# EAGLE board Copy of Copy of UPDATED 06.12.2024 microcontroller badge (EAGLE 9.7.0)

Size 230.49 x 124.48 mm. Coordinates in mm from the lower left corner, seen from the top.
Outline: 0,0 230.49,0 230.49,124.48 0,124.48 0,0
Copper layers (1*16): Top 0.035mm / dielectric 1.5mm / Bottom 0.035mm
Design rules "default": minimum track width 6mil, minimum drill 0.35mm, track to track 6mil, track to pad 6mil, pad to pad 6mil, via to via 6mil, smd to smd 6mil, copper to edge 40mil, drill to drill 6mil, minimum pad ring 10mil, minimum via ring 8mil, stop-mask expansion 4mil, vias tented up to drill 0mil, thermal gap 10mil

## Footprints (pad centres in the part's own frame; a part is rotated, then mirrored left to right if it is on the bottom)
BATTERY-GENERIC = drill 1.118 pad 3.15 octagon: + 2.54,0; - -2.54,0
LEDRD254W60D565H860B = drill 0.981 pad 1.581: 1 -1.27,0; 2 1.27,0
LEDRD254W60D565H860B_O = drill 0.981 pad 1.581: 1 -1.27,0; 2 1.27,0
LEDRD254W60D565H860B_Y = drill 0.981 pad 1.581: 1 -1.27,0; 2 1.27,0
LEDRD254W60D565H860B_G = drill 0.981 pad 1.581: 1 -1.27,0; 2 1.27,0
LEDRD254W60D565H860B_B = drill 0.981 pad 1.581: 1 -1.27,0; 2 1.27,0
PIEZO = drill 1 pad 1.6: 1 -3.5,0; 2 3.5,0
RESAD1016W63L850D250B = drill 0.83 pad 1.43: 1 -5.08,0; 2 5.08,0
HA-06-SM065 = drill 1 pad 1.676: 1 -2.54,-2.54; 2 0,2.54; 3 2.54,-2.54
SWITCH-MOMENTARY-PTH-6.5MM = drill 1.016 pad 1.88: 1 -3.251,2.261; 2 3.251,2.261; 3 -3.251,-2.261; 4 3.251,-2.261
SWITCH-SPDT-PTH-8.5X3.7MM = drill 1.016 pad 1.88: 1 -2.54,0; 2 0,0; 3 2.54,0
ARDUINO-UNO-R3-SHIELD = drill 1.016 pad 1.88: 3.3V 24.13,-2.54; 5V 24.13,0; A0 24.13,12.7; A1 24.13,15.24; A2 24.13,17.78; A3 24.13,20.32; A4 24.13,22.86; A5 24.13,25.4; AREF -24.13,-13.97; D2 -24.13,20.32; D3 -24.13,17.78; D4 -24.13,15.24; D5 -24.13,12.7; D6 -24.13,10.16; D7 -24.13,7.62; D8 -24.13,3.81; D9 -24.13,1.27; D10 -24.13,-1.27; D11 -24.13,-3.81; D12 -24.13,-6.35; D13 -24.13,-8.89; GND@0 24.13,2.54; GND@1 24.13,5.08; GND@2 -24.13,-11.43; IOREF 24.13,-7.62; NC 24.13,-10.16; RES 24.13,-5.08; RX -24.13,25.4; SCL -24.13,-19.05; SDA -24.13,-16.51; TX -24.13,22.86; VIN 24.13,7.62
DIP787W55P254L958H533Q8B-8P3 = drill 0.852 pad 1.452: 1 -3.81,3.81; 2 -3.81,1.27; 3 -3.81,-1.27; 4 -3.81,-3.81; 5 3.81,-3.81; 6 3.81,-1.27; 7 3.81,1.27; 8 3.81,3.81
JHD-162A = drill 1.016 long: 1 -19.05,0; 2 -16.51,0; 3 -13.97,0; 4 -11.43,0; 5 -8.89,0; 6 -6.35,0; 7 -3.81,0; 8 -1.27,0; 9 1.27,0; 10 3.81,0; 11 6.35,0; 12 8.89,0; 13 11.43,0; 14 13.97,0; 15 16.51,0; 16 19.05,0

## Placement (x,y rotation side)
BAT1  4.5V  [BATTERY-GENERIC]  56.52,114.14 270 top
D1  RED  [LEDRD254W60D565H860B]  31.21,48.58 0 top
D2  ORANGE  [LEDRD254W60D565H860B_O]  25.51,48.43 0 top
D3  YELLOW  [LEDRD254W60D565H860B_Y]  18.91,48.64 0 top
D4  GREEN  [LEDRD254W60D565H860B_G]  12.79,48.64 0 top
D5  BLUE  [LEDRD254W60D565H860B_B]  6.06,48.39 0 top
PIEZOSOUNDTACK  PIEZO  [PIEZO]  66.65,87.73 0 top
R1  220  [RESAD1016W63L850D250B]  48.84,83.11 90 top
R2  220  [RESAD1016W63L850D250B]  182.52,115.51 270 top
R3  220  [RESAD1016W63L850D250B]  46.34,83.06 90 top
R4  220  [RESAD1016W63L850D250B]  43.94,82.88 90 top
R5  220  [RESAD1016W63L850D250B]  51.58,82.88 90 top
R6  220  [RESAD1016W63L850D250B]  41.4,82.88 90 top
RPOTCONTRAST1  10k  [HA-06-SM065]  93.69,90.95 0 top
SDEBUG  SWITCH_MOMENTARY  [SWITCH-MOMENTARY-PTH-6.5MM]  125.67,59.07 270 top
SGAMEPLAY  SWITCH_MOMENTARY  [SWITCH-MOMENTARY-PTH-6.5MM]  133.68,59.35 270 top
SMUTE/UNMUTE  TOGGLE  [SWITCH-SPDT-PTH-8.5X3.7MM]  135.22,69.68 0 top
UARDUINO  ARDUINO-UNO-R3-SHIELD  [ARDUINO-UNO-R3-SHIELD]  182.6,82.75 90 top
UATTINY  ATtiny25-20PU  [DIP787W55P254L958H533Q8B-8P3]  45.04,50.47 90 top
ULDC_DISPLAY  LCD-16X2JHD-162A  [JHD-162A]  95.84,36.63 0 top

## Library data of the parts
BAT1 PIEZOSOUNDTACK R1-R6 RPOTCONTRAST1 SDEBUG SGAMEPLAY SMUTE/UNMUTE UARDUINO ULDC_DISPLAY = Tinkercad
D1 = Tinkercad; CATEGORY: Opto-Electronic; SUB-CATEGORY: LED; VALUE: LED_RED
D2 = Tinkercad; CATEGORY: Opto-Electronic; SUB-CATEGORY: LED; VALUE: LED_ORANGE
D3 = Tinkercad; CATEGORY: Opto-Electronic; SUB-CATEGORY: LED; VALUE: LED_YELLOW
D4 = Tinkercad; CATEGORY: Opto-Electronic; SUB-CATEGORY: LED; VALUE: LED_GREEN
D5 = Tinkercad; CATEGORY: Opto-Electronic; SUB-CATEGORY: LED; VALUE: LED_BLUE
UATTINY = Tinkercad; CATEGORY: IC_Embedded; CORE: AVR; DESCRIPTION: AVR AVR® ATtiny, Functional Safety (FuSa) Microcontroller IC 8-Bit 20MHz 2KB (1K x 16) FLASH 8-PDIP; MANUFACTURER: Microchip Technology; MPN: ATtiny25-20PU; OPERATING_TEMP: -40°C to 85°C; PART_STATUS: Active; ROHS_COMPLIANT: COMPLIANT; SERIES: ATtiny25; SPEED: 20 MHz; SUB-CATEGORY: Microcontroller; TYPE: AVR Microcontroller

## Nets
BAT1+: BAT1.+ UARDUINO.VIN
BAT1-: BAT1.- D1.2 D2.2 D3.2 D4.2 D5.2 PIEZOSOUNDTACK.2 RPOTCONTRAST1.3 SDEBUG.2 SGAMEPLAY.2 SMUTE/UNMUTE.3 UARDUINO.GND@0 UARDUINO.GND@1 UARDUINO.GND@2 UATTINY.4 ULDC_DISPLAY.1 ULDC_DISPLAY.5 ULDC_DISPLAY.16
D1_A: D1.1 R1.2
D2_A: D2.1 R3.2
D3_A: D3.1 R4.2
D4_A: D4.1 R5.2
D5_A: D5.1 R6.2
UARDUINO_5V: R2.2 RPOTCONTRAST1.1 UARDUINO.5V UATTINY.8 ULDC_DISPLAY.2
UARDUINO_D2: SGAMEPLAY.3 UARDUINO.D2
UARDUINO_D3: UARDUINO.D3 ULDC_DISPLAY.14
UARDUINO_D4: UARDUINO.D4 ULDC_DISPLAY.13
UARDUINO_D5: UARDUINO.D5 ULDC_DISPLAY.12
UARDUINO_D6: UARDUINO.D6 ULDC_DISPLAY.11
UARDUINO_D8: SMUTE/UNMUTE.2 UARDUINO.D8
UARDUINO_D9: UARDUINO.D9 ULDC_DISPLAY.6
UARDUINO_D11: UARDUINO.D11 ULDC_DISPLAY.4
UARDUINO_D12: PIEZOSOUNDTACK.1 UARDUINO.D12
UARDUINO_D13: SDEBUG.3 UARDUINO.D13
UATTINY_PB0: R1.1 UATTINY.5
UATTINY_PB1: R3.1 UATTINY.6
UATTINY_PB2: UARDUINO.D7 UATTINY.7
UATTINY_PB3: R4.1 UATTINY.2
UATTINY_PB4: R5.1 UATTINY.3
UATTINY_PB5/!RESET!: R6.1 UATTINY.1
ULDC_DISPLAY_LED+: R2.1 ULDC_DISPLAY.15
ULDC_DISPLAY_VO: RPOTCONTRAST1.2 ULDC_DISPLAY.3

## Tracks (layer width: path | path; a pad name or v marks a point on that pad's centre or on a via)
BAT1+  (1 unrouted)
BAT1-  (17 unrouted)
D1_A  (1 unrouted)
D2_A  (1 unrouted)
D3_A  (1 unrouted)
D4_A  (1 unrouted)
D5_A  (1 unrouted)
UARDUINO_5V  (4 unrouted)
UARDUINO_D2  (1 unrouted)
UARDUINO_D3  (1 unrouted)
UARDUINO_D4  (1 unrouted)
UARDUINO_D5  (1 unrouted)
UARDUINO_D6  (1 unrouted)
UARDUINO_D8  (1 unrouted)
UARDUINO_D9  (1 unrouted)
UARDUINO_D11  (1 unrouted)
UARDUINO_D12  (1 unrouted)
UARDUINO_D13  (1 unrouted)
UATTINY_PB0  (1 unrouted)
UATTINY_PB1  (1 unrouted)
UATTINY_PB2  (1 unrouted)
UATTINY_PB3  (1 unrouted)
UATTINY_PB4  (1 unrouted)
UATTINY_PB5/!RESET!  (1 unrouted)
ULDC_DISPLAY_LED+  (1 unrouted)
ULDC_DISPLAY_VO  (1 unrouted)